# Altium PCB PCB1.PcbDoc
Units mm, origin at the board's own origin, x right, y up, seen from the top; angles counter-clockwise.
Board outline 152.4 x 101.6 mm, 2 copper layers (Top Layer, Bottom Layer); 15 components, 10 nets, 36 pads, 0 vias.
Unrouted connection lines stored in the file: 26.
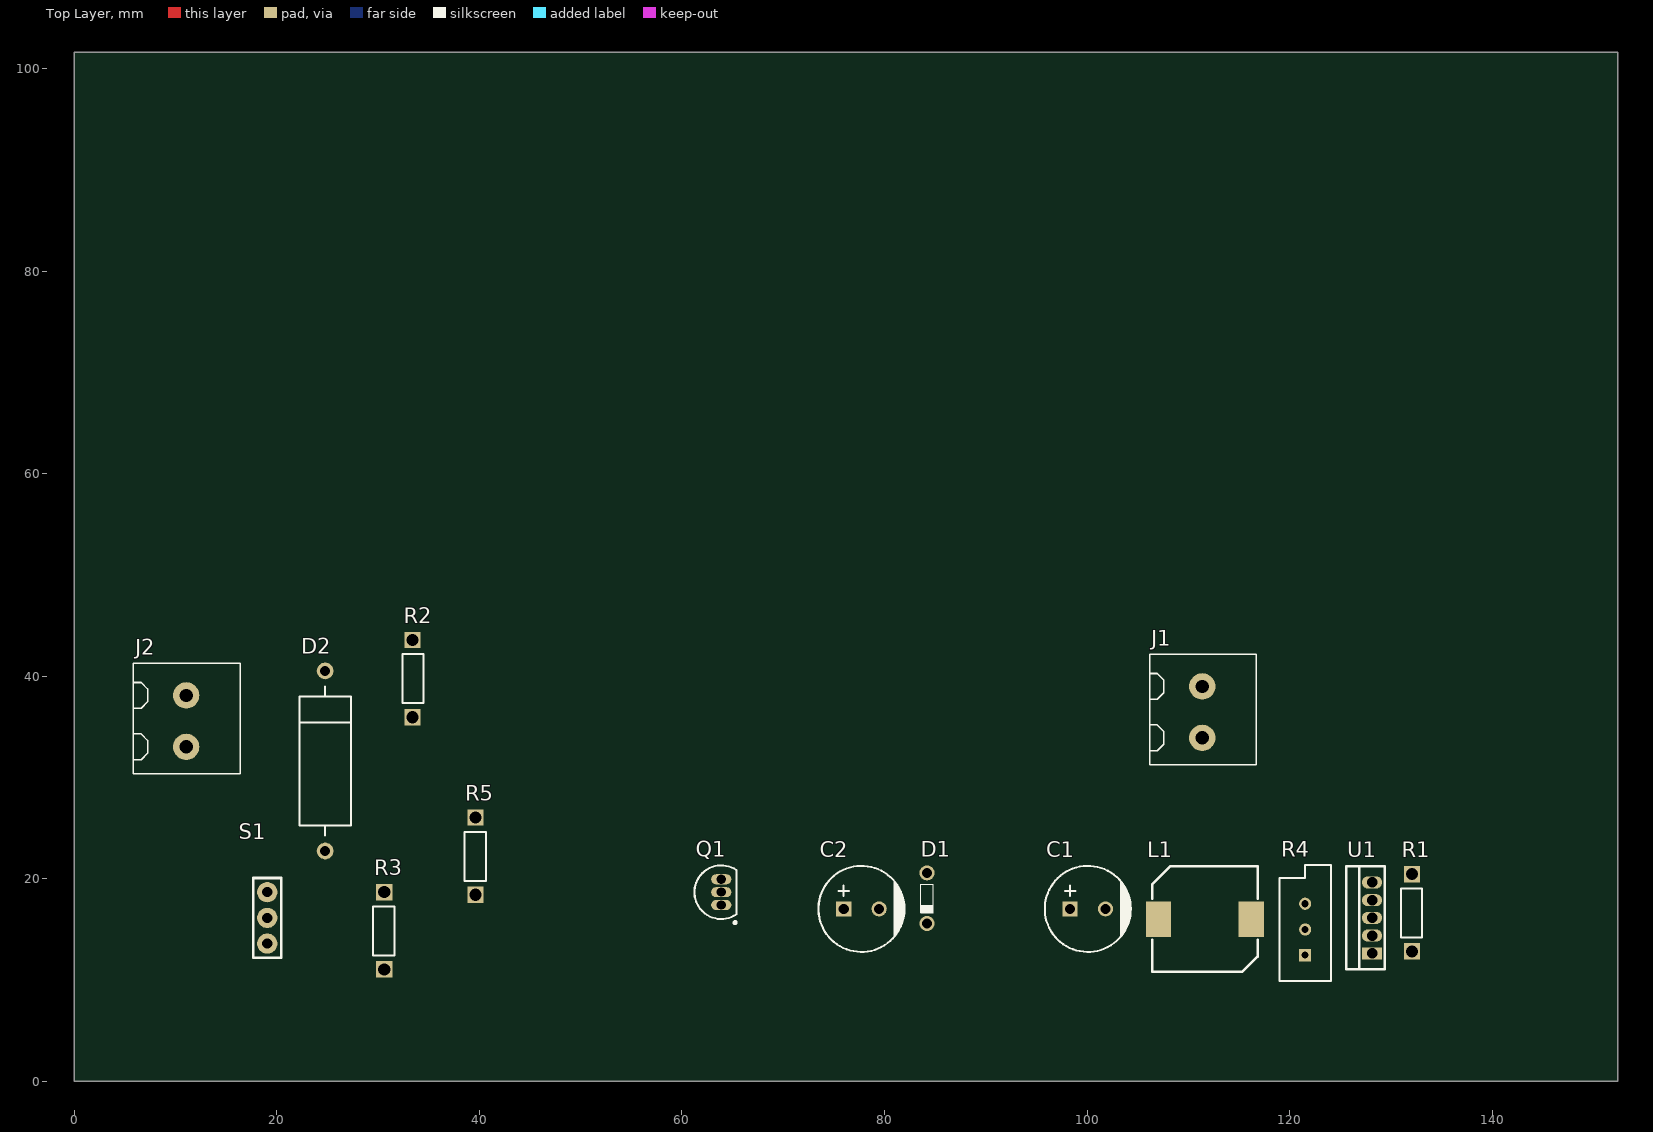
[diagram p0: Top Layer view]
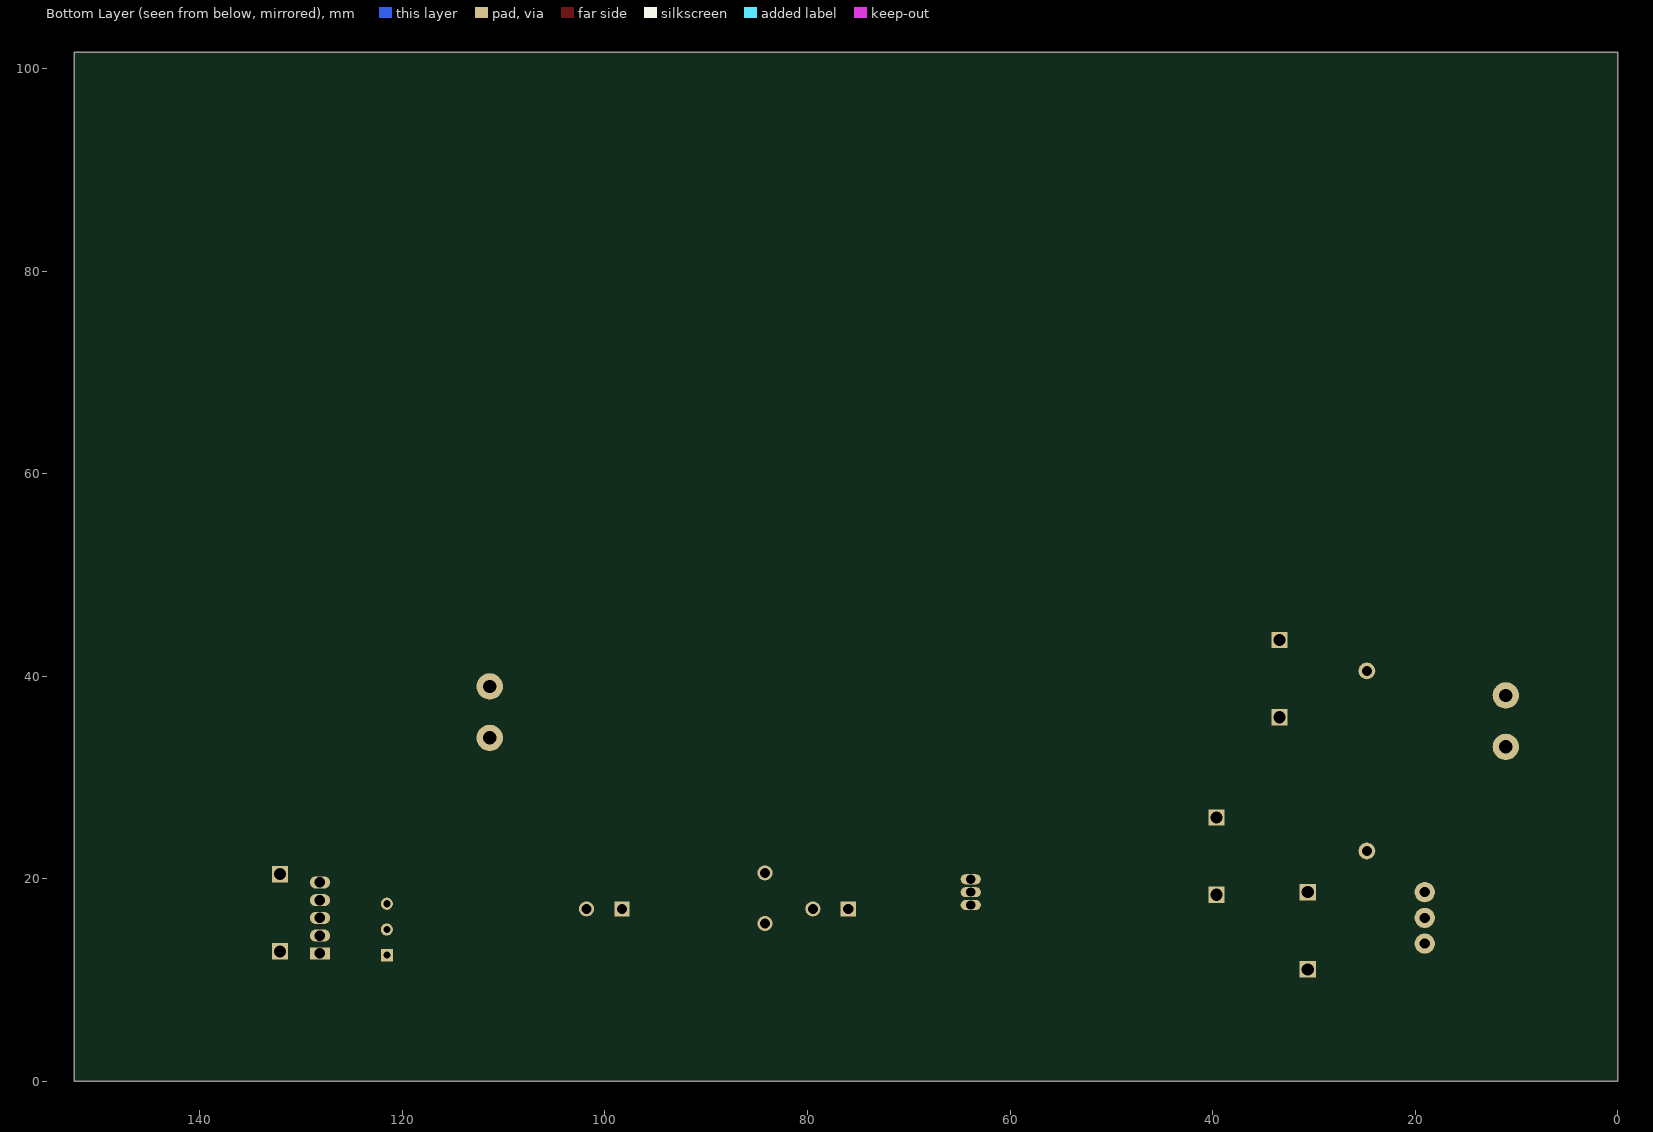
[diagram p1: Bottom Layer view, seen from below]

## Layer stack, top to bottom
Top Solder: solder mask 0.0102, Solder Resist, Dk 3.5
Top Layer: signal copper 0.0356
Dielectric 1: dielectric 0.32, FR-4, Dk 4.8
Bottom Layer: signal copper 0.0356
Bottom Solder: solder mask 0.0102, Solder Resist, Dk 3.5

## Board outline
0,0 152.4,0 152.4,101.6 0,101.6

## Design rules (kind name [scope] priority, off if disabled: settings)
Clearance [All] p1: gap=0.254 ignorepadtopadclearanceinfootprint=FALSE except(0: Arc-Hole Track-Hole SMDPad-Hole THPad-Hole Via-Hole Fill-Hole Poly-Hole Region-Hole Text-Hole)
PolygonConnect [All] p1: connectstyle=Relief reliefconductorwidth=0.254 reliefentries=4 polygonreliefangle="90 Angle" airgapwidth=0.254
RoutingVias [All] p1: holewidth=0.711 width=1.27 viastyle="Through Hole" minholewidth=0.711 minwidth=1.27 maxholewidth=0.711 maxwidth=1.27
SolderMaskExpansion [All] p1: expansion=0.102
Width [All] p1: maxlimit=0.254 minlimit=0.254 preferedwidth=0.254
30 further rules are at their usual default settings.

## Components (designator, comment, footprint, x,y, rotation, side; value= is the part's Value field where it differs from the comment)
C1 "6.8UF" RADPOL8X11 100.076,17.018 r0 top
C2 "6.8UF" RADPOL8X11 77.724,17.018 r0 top
D1 "DIODE - SCHOTTKY" DIO_PTH_5MM 84.201,18.034 r90 top value=SS12
D2 "D Zener" DIODE-0.7 24.765,31.623 r90 top
J1 "2-Ways Wire-to-Board Horizontal" "KF128 2P" 111.379,38.989 r270 top
J2 "2-Ways Wire-to-Board Horizontal" "KF128 2P" 11.049,38.1 r270 top
L1 "5.6UH" Inductor6A 111.633,16.002 r0 top
Q1 "NPN" TO-226-AA 63.881,18.669 r0 top
R1 "*" RES-7.62mm 132.08,16.637 r90 top
R2 "*" RES-7.62mm 33.401,39.751 r270 top
R3 "*" RES-7.62mm 30.607,14.859 r90 top
R4 "RPot" VR5 121.539,14.986 r90 top value=10k
R5 "*" RES-7.62mm 39.624,22.225 r90 top
S1 "SW-SPDT" "Pin Header 3 Ways" 19.05,13.589 r90 top
U1 "LM2576HV 5.0" LM2576-TO220 128.143,16.129 r0 top

## Footprints (in the part's own frame and the unit in brackets; to place one, negate y for a bottom-side part, rotate by r counter-clockwise, add the part's x,y. Pads: shape width x height; smd on the part's side, far side on the other; paste and mask are expansions set on the pad)
DIO_PTH_5MM [mm]
  round 1.5 hole 1: A(2.54,0) K(-2.46,0)
  silkscreen extent -1.4,-0.64 1.4,0.64
DIODE-0.7 [mm] "Diode, Thru-Hole; 2 Leads; 0.7 in Pin Spacing"
  round 1.65 hole 1: 1(-8.89,0) 2(8.89,0)
  silkscreen extent -7.37,-2.54 7.37,2.54
Inductor6A [mm]
  rect 2.5x3.5 smd: 1(-4.572,0) 2(4.572,0)
  silkscreen extent -5.21,-5.21 5.21,5.21, body extent -4.97,-5.08 5.33,5.12, height 3.9
"KF128 2P" [mm] "2 Position Wire to Board Terminal Block Horizontal with Board 0.200\" (5.08mm) Through Hole"
  round 2.6 hole 1.3: 1(0,0) 2(5.08,0)
  silkscreen extent -3.18,-5.21 7.75,5.33, body extent -3.09,-5.26 7.67,5.24, height 14.31
LM2576-TO220 [mm]
  rect 2x1.2 hole 1.03: 1(0,-3.5)
  oval 2x1.2 hole 1.03: 2(0,-1.75) 3(0,0) 4(0,1.75) 5(0,3.5)
  silkscreen extent -2.54,-5.08 1.27,5.08
"Pin Header 3 Ways" [mm] "Connector Header 3 ways PTH 0.100\" (2.54mm)"
  round 2 hole 1: 1(0,0) 2(2.54,0) 3(5.08,0)
  silkscreen extent -1.4,-1.4 6.48,1.4, body extent -1.27,-1.27 6.35,1.27, height 10.11
RADPOL8X11 [mm]
  rect 1.5x1.5 hole 1: 1(-1.75,0)
  round 1.5 hole 1: 2(1.75,0)
  silkscreen extent -4.25,-4.25 4.25,4.25, body extent -4,-3.94 4,4.04, height 3.3
RES-7.62mm [mm]
  rect 1.6x1.6 hole 1.2: 1(-3.81,0) 2(3.81,0)
  silkscreen extent -2.43,-1.01 2.38,1.09, body extent -4.06,-1.15 4.16,1.25, height 3.2
TO-226-AA [mm] "TO, Flat Index; 3 In-Line, Axial Leads; Body Dia. 4.8mm; Leads 0.55 x 0.51 mm (max)"
  oval 2x1 hole 0.9: 1(0,-1.27) 2(0,0) 3(0,1.27)
  silkscreen extent -2.65,-3.13 1.52,2.65, body extent -2.65,-2.66 1.52,2.66, height 5.33
VR5 [mm] "Thru-Hole; 3 Leads"
  rect 1.2x1.2 hole 0.7: 1(-2.54,0)
  round 1.2 hole 0.7: 2(0,0) 3(2.54,0)
  silkscreen extent -5.08,-2.54 6.35,2.54

## Part data
C1 C2: library part ELECTRO1_1
D1: "Schottky Diode", Digikey part number=SS12E-TPMSCT-ND, Digikey price 1x=0.70, Digikey price 100x=0.224
D2: "Zener Diode", LatestRevisionDate=17-Jul-2002, LatestRevisionNote="Re-released for DXP Platform.", PackageDescription="Diode, Thru-Hole; 2 Leads; 0.7 in Pin Spacing", PackageReference=DIODE-0.7, Published=8-Jun-2000, Publisher="Altium Limited"
J1 J2: library part "KF128 2P", "2 Position Wire to Board Terminal Block Horizontal with Board 0.200\" (5.08mm) Through Hole", Manufacturer 1="Amphenol Anytek", Manufacturer 1 PN=VI0221520000G, ComponentLink1Description=Datasheet, ComponentLink1URL=http://www.on-shore.com/wp-content/uploads/2015/09/OSTTAXX4163.pdf, Digikey PN=609-3936-ND, Mouser PN=649-VI02215200J0G
L1: library part IND_1, "FIXED IND 5.6UH 6A 14.4 MOHM SMD", ClassName=REG_3, Digikey=732-4107-1-ND
Q1: "NPN Bipolar Transistor", Code_JEDEC=TO-226-AA, LatestRevisionDate=17-Jul-2002, LatestRevisionNote="Re-released for DXP Platform.", PackageDescription="TO, Flat Index; 3 In-Line, Axial Leads; Body Dia. 4.8mm; Leads 0.55 x 0.51 mm (max)", PackageReference=TO-226-AA, Published=8-Jun-2000, Publisher="Altium Limited"
R1 R2 R3 R5: library part RES_PTH300, "Pin Through Hole Resistor 300mils/7.62mm"
R4: "Potentiometer", LatestRevisionDate=17-Jul-2002, LatestRevisionNote="Re-released for DXP Platform.", PackageDescription="Variable Resistor, Thru-Hole; 3 Leads", PackageReference=VR5, Published=8-Jun-2000, Publisher="Altium Limited", Set Position=0.5, Sim Note="Enter the Resistance value and the set point into parameter fields."
S1: "SPDT Subminiature Toggle Switch, Right Angle Mounting, Vertical Actuation", ComponentLink1Description="Manufacturer Link", ComponentLink1URL=http://www.apem.com, DatasheetVersion=05-Dec-2000, LatestRevisionDate=17-Dec-2003, LatestRevisionNote="Schematic revised, PCB Footprint replaced.", PackageDescription="Switch; 4 Leads", PackageReference=TL36WW15050, Published=24-Mar-1999, Publisher="Altium Limited"
U1: library part LM2576

## Nets (pads, with @x,y where several pads share a name; then routed paths per layer and width w, separated by ;. In a path a pad name is that pad's centre, name@x,y a point inside that pad or via, vN(x,y) a via of type N, cw(c..) or ccw(c..) an arc to the next point about the centre after c; other vN are vias at no path point)
GND: C1.2 C2.2 D1.A J1.2 J2.2 Q1.3 R1.1 R5.1 S1.3 U1.3
NetC2_1: C2.1 J2.1 L1.2 R4.2
NetD1_K: D1.K L1.1 U1.2
NetD2_1: D2.1 Q1.2 R5.2
NetD2_2: D2.2 R2.1
NetQ1_1: Q1.1 R3.1 S1.1
NetR1_2: R1.2 R4.1
NetR4_3: R4.3 U1.4
NetS1_2: S1.2 U1.5
VCC: C1.1 J1.1 R2.2 R3.2 U1.1